# Altium PCB PCB1.PcbDoc
Units mm, origin at the board's own origin, x right, y up, seen from the top; angles counter-clockwise.
Board outline 27.5 x 55 mm, 2 copper layers (Top Layer, Bottom Layer); 2 components, 16 nets, 40 pads, 2 vias.
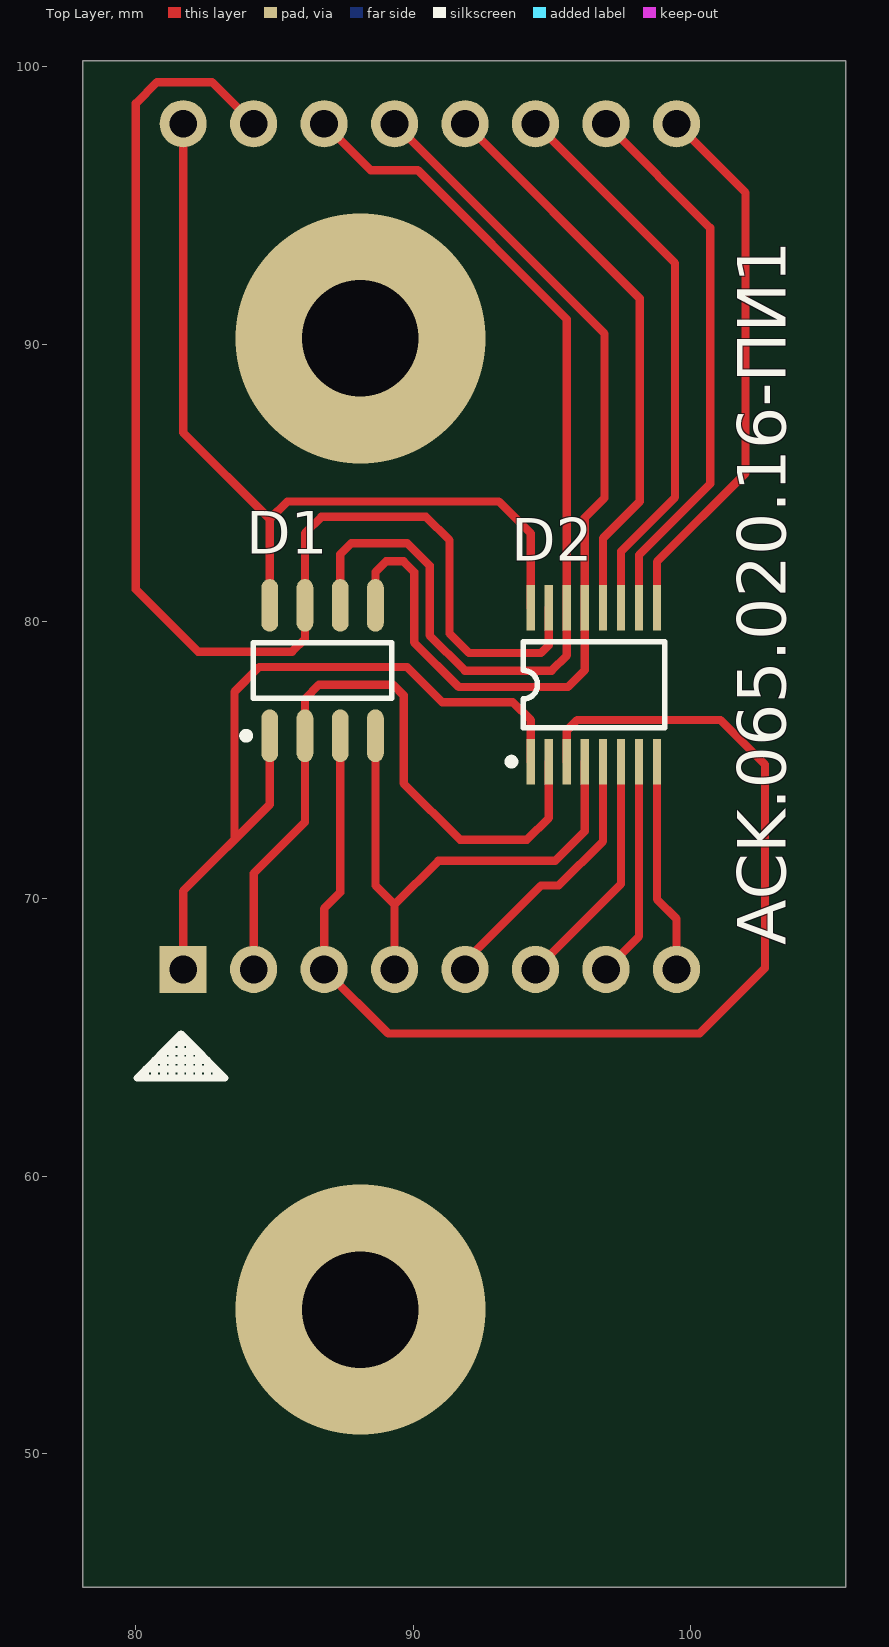
[diagram p0: Top Layer view]
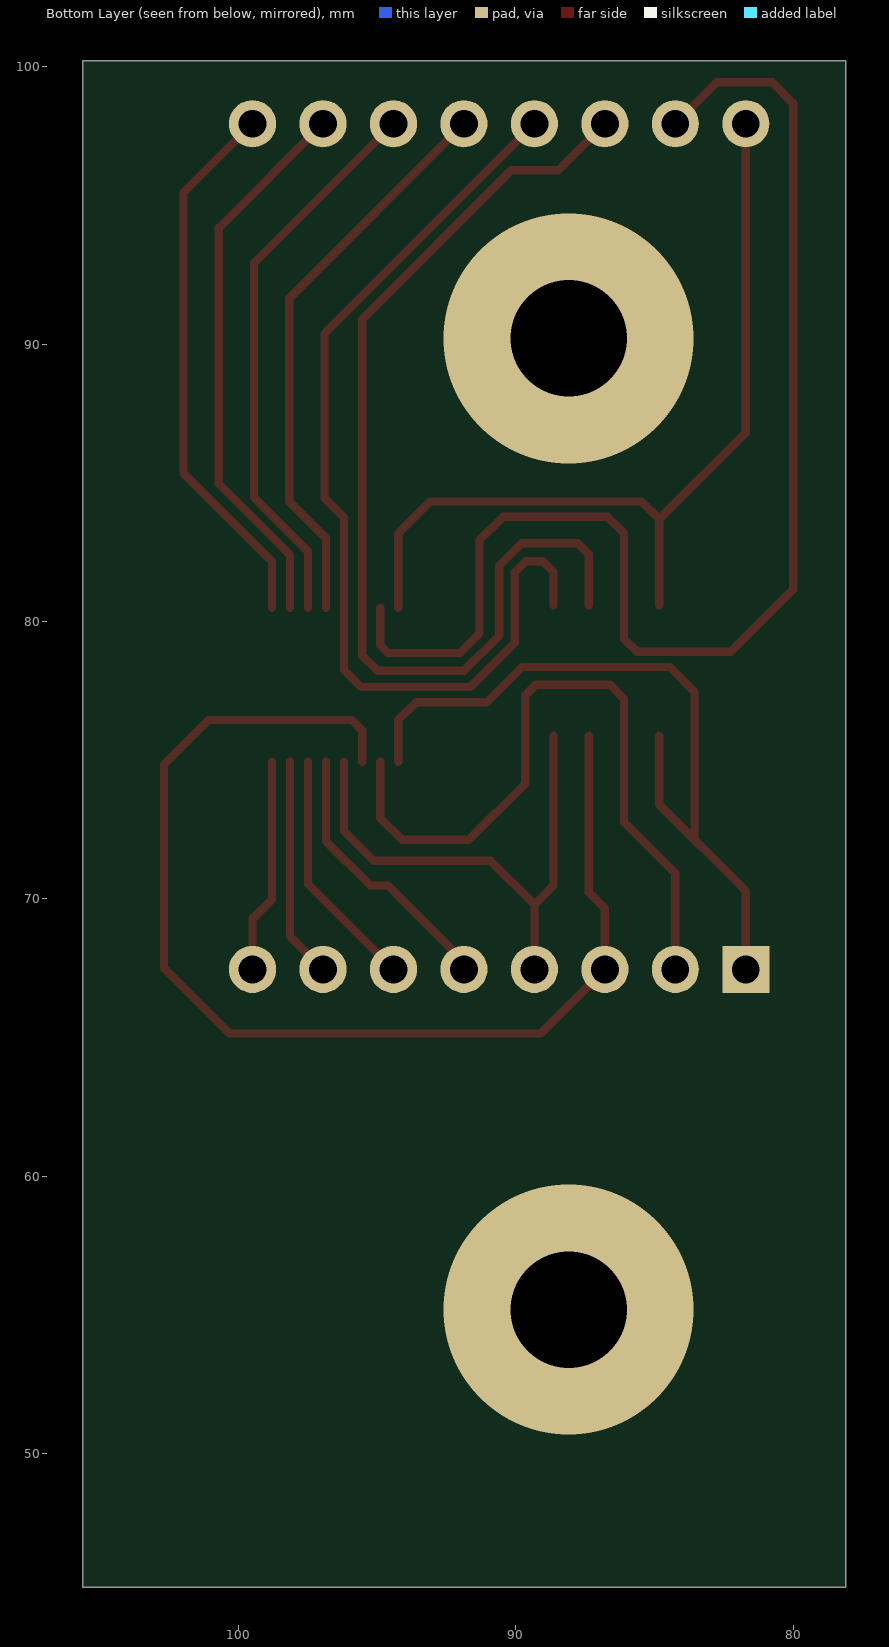
[diagram p1: Bottom Layer view, seen from below]

## Layer stack, top to bottom
Top Solder: solder mask 0.0102, Solder Resist, Dk 3.5
Top Layer: signal copper 0.0356
Dielectric 1: dielectric 0.32, FR-4, Dk 4.8
Bottom Layer: signal copper 0.0356
Bottom Solder: solder mask 0.0102, Solder Resist, Dk 3.5

## Board outline
78.105,45.203 78.105,100.203 105.605,100.203 105.605,45.203

## Design rules (kind name [scope] priority, off if disabled: settings)
Clearance [All] p1: gap=0.254
PolygonConnect [All] p1: connectstyle=Relief reliefconductorwidth=0.254 reliefentries=4 polygonreliefangle="90 Angle" airgapwidth=0.254
RoutingVias [All] p1: holewidth=0.711 width=1.27 viastyle="Through Hole" minholewidth=0.711 minwidth=1.27 maxholewidth=0.711 maxwidth=1.27
SolderMaskExpansion [All] p1: expansion=0.102
Width [All] p1: maxlimit=0.3 minlimit=0.3 preferedwidth=0.3 minimp=50.000000 maximp=50.000000 favimp=50.000000
30 further rules are at their usual default settings.

## Components (designator, comment, footprint, x,y, rotation, side; value= is the part's Value field where it differs from the comment)
D1 "Comment" SO-8_L 86.741,78.232 r90 top
D2 "Comment" RU-16 96.52,77.724 r0 top

## Footprints (in the part's own frame and the unit in brackets; to place one, negate y for a bottom-side part, rotate by r counter-clockwise, add the part's x,y. Pads: shape width x height; smd on the part's side, far side on the other; paste and mask are expansions set on the pad)
RU-16 [mm] "Shrink Small Outline; 16 Leads; Body Width 4.4 mm; Pitch 0.65 mm"
  rect 0.3x1.65 smd: 1(-2.275,-2.775) 2(-1.625,-2.775) 3(-0.975,-2.775) 4(-0.325,-2.775) 5(0.325,-2.775) 6(0.975,-2.775) 7(1.625,-2.775) 8(2.275,-2.775) 9(2.275,2.775) 10(1.625,2.775) 11(0.975,2.775) 12(0.325,2.775) 13(-0.325,2.775) 14(-0.975,2.775) 15(-1.625,2.775) 16(-2.275,2.775)
  silkscreen extent -3.1,-2.9 2.55,1.55
SO-8_L [mm] "8-Pin Small Outline Integrated Circuit 1.27 mm Pitch, IPC High Density"
  oval 1.9x0.6 smd: 1(-2.35,1.905) 2(-2.35,0.635) 3(-2.35,-0.635) 4(-2.35,-1.905) 5(2.35,-1.905) 6(2.35,-0.635) 7(2.35,0.635) 8(2.35,1.905)
  silkscreen extent -2.47,-2.5 1,2.88, body extent -1.95,-2.45 1.95,2.45, height 1.75

## Free pads (board coordinates)
  rect 1.7x1.7 hole 1: 1(81.715,67.463)
  round 1.7 hole 1: 2(84.255,67.463) 4(89.335,67.463) 5(91.875,67.463) 6(94.415,67.463) 7(96.955,67.463) 8(99.495,67.463) 9(99.495,97.943) 10(96.955,97.943) 11(94.415,97.943) 12(91.875,97.943) 13(89.335,97.943) 14(86.795,97.943) 15(84.255,97.943) 16(81.715,97.943)
  round 1.7 hole 1 paste+0: 3(86.795,67.463)

## Via types
v1: diameter 9, hole 4.2, Top Layer to Bottom Layer, 2 vias

## Nets (pads, with @x,y where several pads share a name; then routed paths per layer and width w, separated by ;. In a path a pad name is that pad's centre, name@x,y a point inside that pad or via, vN(x,y) a via of type N, cw(c..) or ccw(c..) an arc to the next point about the centre after c; other vN are vias at no path point)
1: D1.1 D2.1 pad.1 | length 28.3
  Top Layer w0.3: pad.1 81.715,70.285 84.836,73.406 D1.1 ; 83.566,72.263 83.566,77.47 84.455,78.359 89.789,78.359 91.059,77.089 93.599,77.089 94.245,76.443 D2.1
2: D1.2 D2.2 pad.2 | length 26
  Top Layer w0.3: pad.2 84.255,70.92 86.106,72.771 D1.2 86.106,77.216 86.614,77.724 89.281,77.724 89.662,77.343 89.662,74.168 91.694,72.136 94.107,72.136 94.895,72.924 D2.2
3: D1.3 D2.3 pad.3 | length 42.9
  Top Layer w0.3: D1.3 87.376,70.231 86.795,69.65 pad.3 89.107,65.151 100.33,65.151 102.685,67.506 102.685,74.851 101.082,76.454 95.917,76.454 95.545,76.082 D2.3
4: D1.4 D2.4 pad.4 | length 19.2
  Top Layer w0.3: D1.4 88.646,70.485 89.335,69.796 ; pad.4 89.335,69.796 ; D2.4 96.195,72.446 95.123,71.374 90.913,71.374 89.335,69.796
5: D2.5 pad.5 | length 9.9
  Top Layer w0.3: pad.5 91.875,67.745 94.615,70.485 95.25,70.485 96.845,72.08 D2.5
6: D2.6 pad.6 | length 8.8
  Top Layer w0.3: pad.6 97.495,70.543 D2.6
7: D2.7 pad.7 | length 8
  Top Layer w0.3: pad.7 98.145,68.653 D2.7
8: D2.8 pad.8 | length 7.8
  Top Layer w0.3: D2.8 98.795,69.988 99.495,69.288 pad.8
9: D2.9 pad.9 | length 19.8
  Top Layer w0.3: D2.9 98.795,82.158 101.981,85.344 101.981,95.457 pad.9
10: D2.10 pad.10 | length 20.1
  Top Layer w0.3: pad.10 100.711,94.187 100.711,84.963 98.145,82.397 D2.10
11: D2.11 pad.11 | length 20.3
  Top Layer w0.3: pad.11 99.441,92.917 99.441,84.476 97.495,82.53 D2.11
12: D2.12 pad.12 | length 20.6
  Top Layer w0.3: pad.12 98.171,91.647 98.171,84.328 96.845,83.002 D2.12
13: D1.5 D2.13 pad.13 | length 35.6
  Top Layer w0.3: D1.5 88.646,81.788 89.027,82.169 89.662,82.169 90.043,81.788 90.043,79.248 91.648,77.643 95.585,77.643 96.195,78.253 D2.13 96.195,83.749 96.901,84.455 96.901,90.377 pad.13
14: D1.6 D2.14 pad.14 | length 37.6
  Top Layer w0.3: pad.14 88.472,96.266 90.17,96.266 95.545,90.891 D2.14 95.545,78.781 94.996,78.232 91.867,78.232 90.597,79.502 90.597,82.017 89.789,82.825 87.778,82.825 87.376,82.423 D1.6
15: D1.7 D2.15 pad.15 | length 48.2
  Top Layer w0.3: pad.15 82.757,99.441 80.772,99.441 80.01,98.679 80.01,81.153 82.25,78.913 85.644,78.913 86.106,79.375 D1.7 86.106,83.185 86.695,83.774 90.47,83.774 91.313,82.931 91.313,79.569 92.015,78.867 94.615,78.867 94.895,79.147 D2.15
16: D1.8 D2.16 pad.16 | length 31.5
  Top Layer w0.3: pad.16 81.715,86.814 84.836,83.693 ; D1.8 84.836,83.693 ; D2.16 94.245,83.174 93.091,84.328 85.471,84.328 84.836,83.693
copper on no net:
  other v1: 88.105,55.203 88.105,90.203

## Silkscreen, mask and mechanical layers (free items; w line width, h text height)
Top Overlay:
  lines w0.254: 80.365,63.554 80.365,63.871 82.905,63.871 82.905,63.554 ; 80.682,63.554 80.682,64.189 82.587,64.189 82.587,63.554 ; 81,63.554 81,64.506 82.27,64.506 82.27,63.554 ; 81.317,63.554 81.317,64.824 81.952,64.824 81.952,63.554 ; 81.635,63.554 81.635,65.141 ; 81.635,65.141 80.047,63.554 83.222,63.554 81.635,65.141
  text "ACK.065.020.16-ПИ1" at 104.013,68.326 h3 r90
Mechanical 1:
  the board outline again, w0.254